# Altium PCB pcb.pcbdoc
Units mil, origin at the board's own origin, x right, y up, seen from the top; angles counter-clockwise.
Board outline 3850 x 2675 mil, 2 copper layers (Top Layer, Bottom Layer); 114 components, 115 nets, 459 pads, 83 vias.
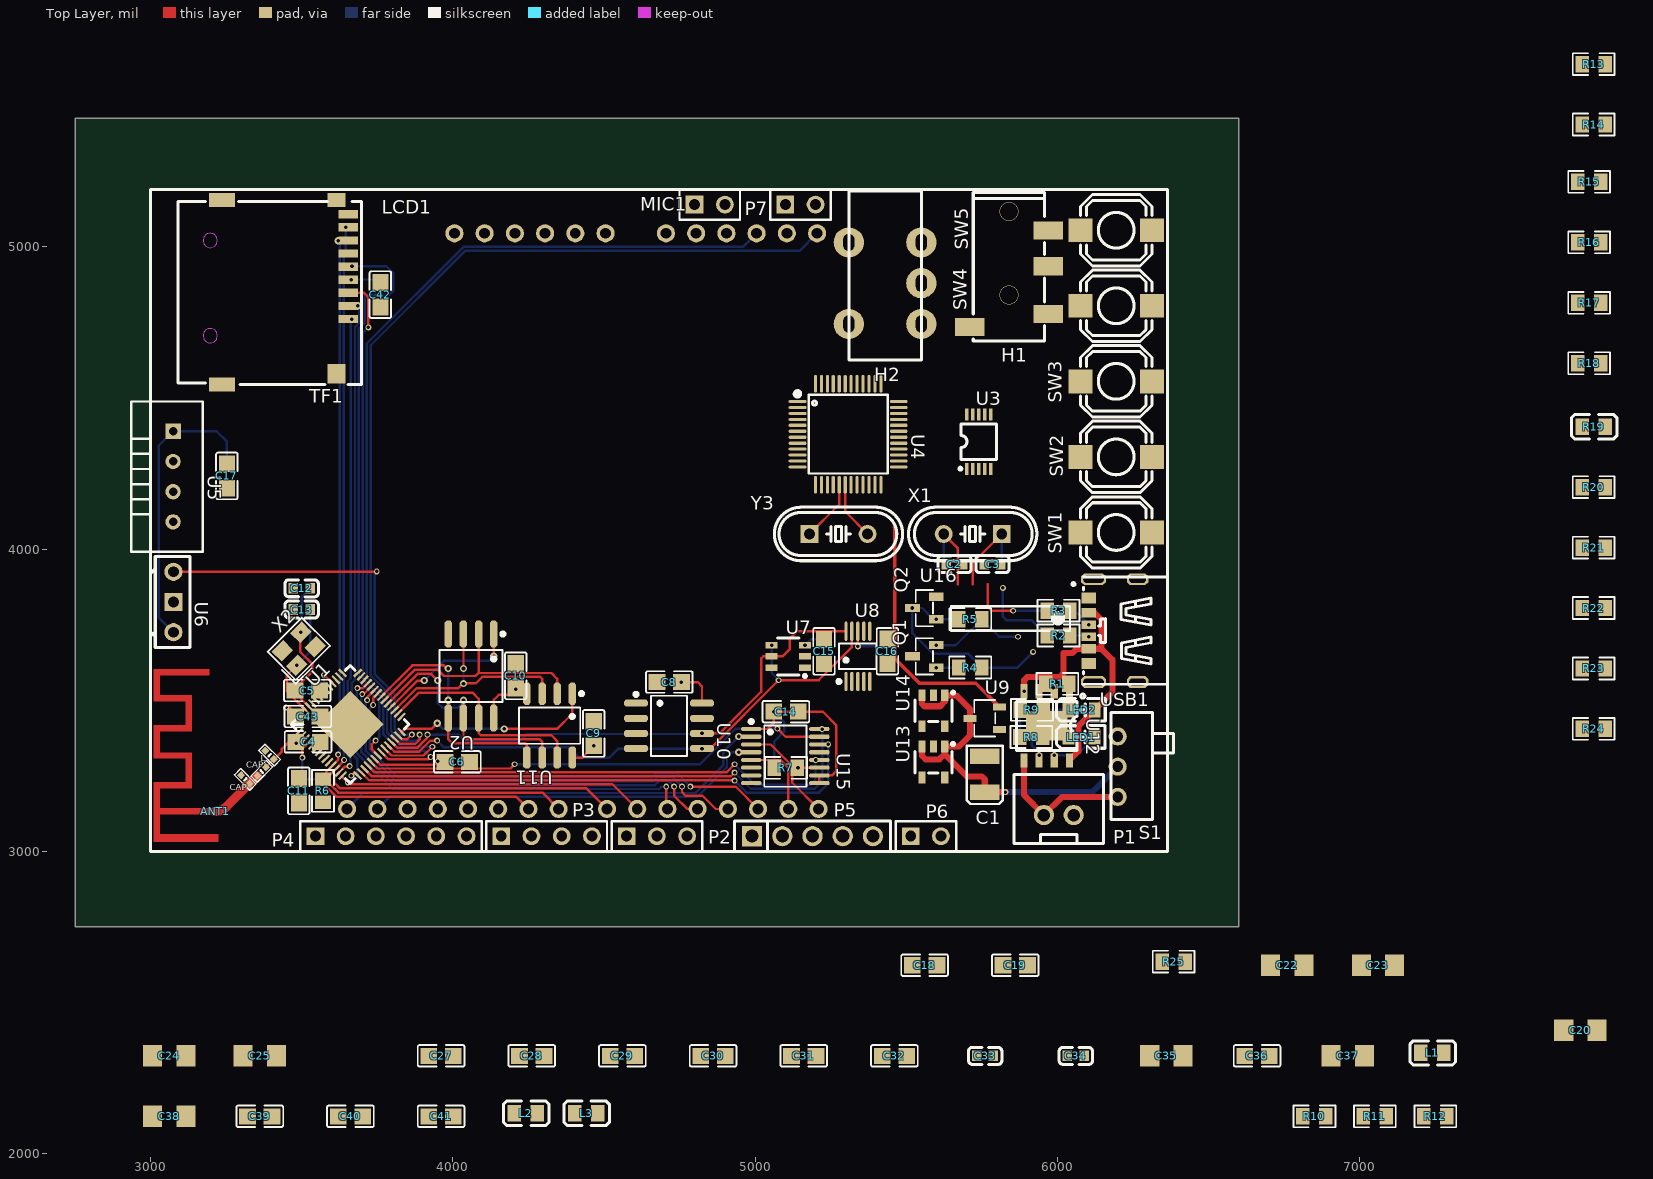
[diagram p0: Top Layer view]
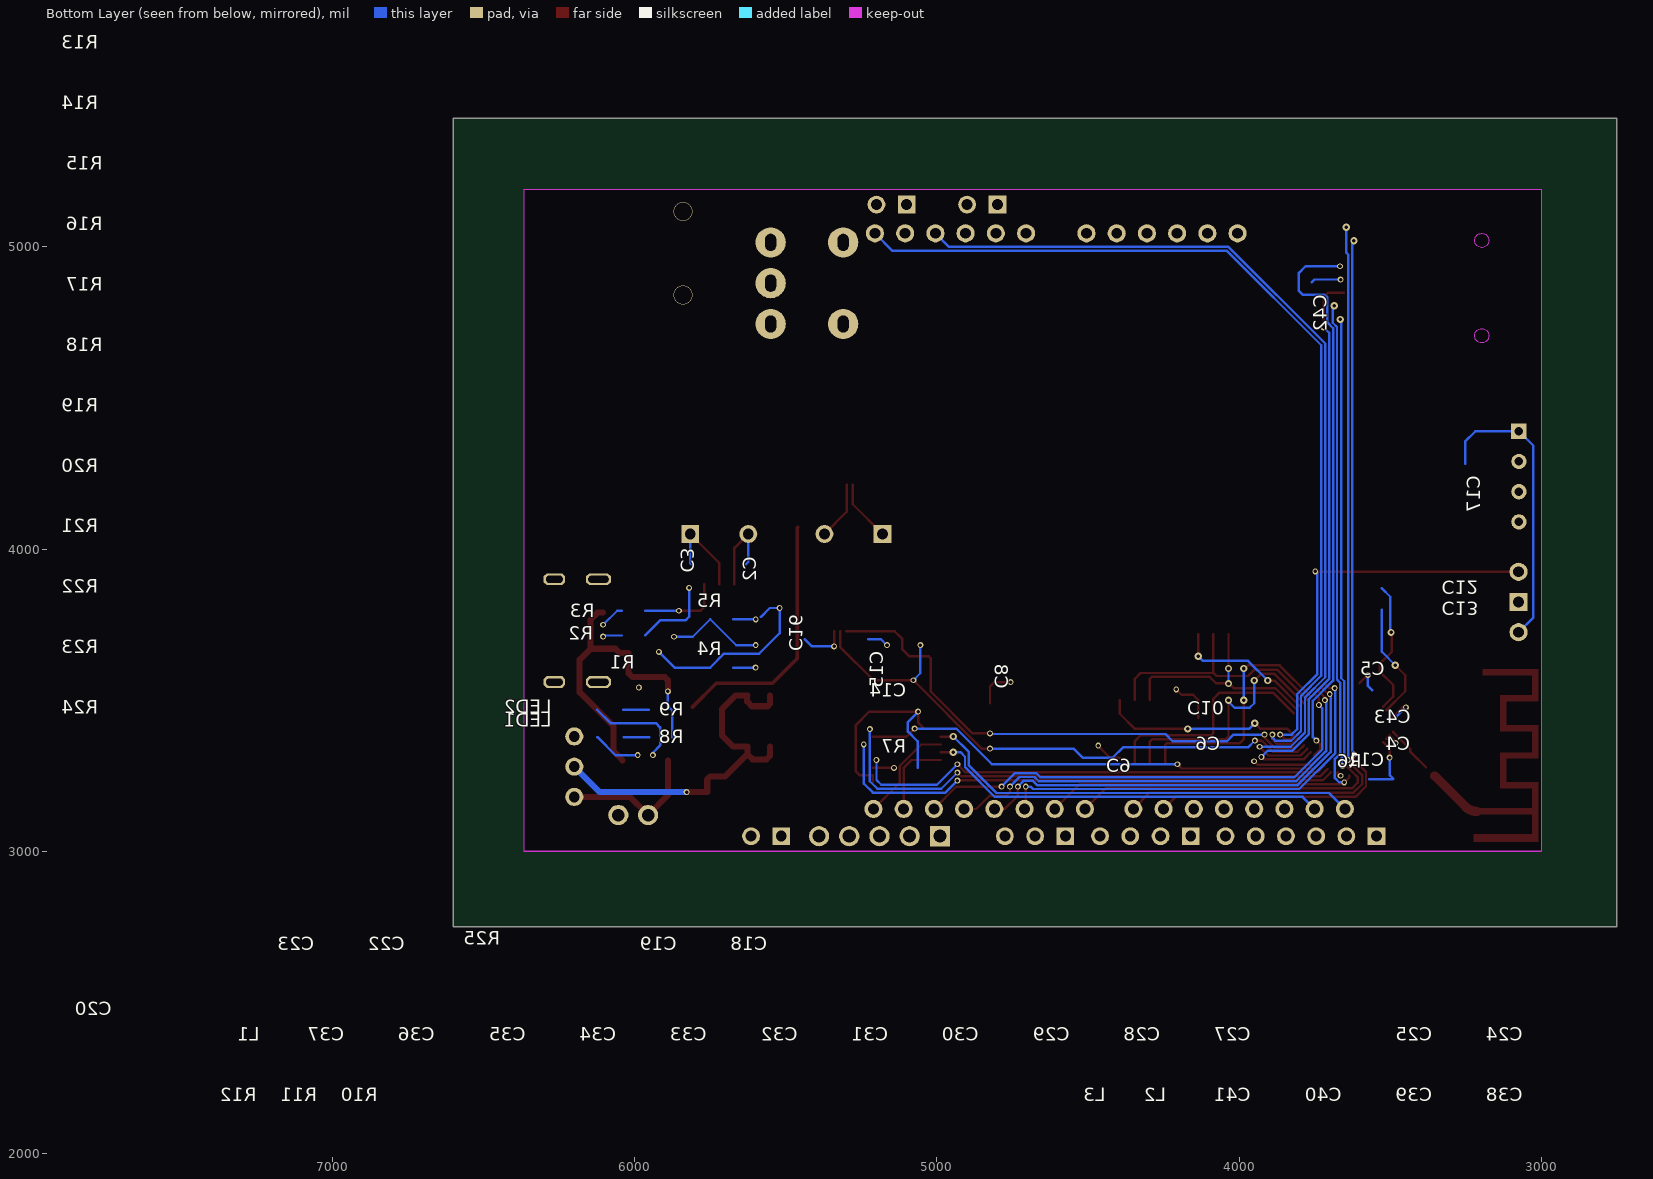
[diagram p1: Bottom Layer view, seen from below]

## Layer stack, top to bottom
Top Solder: solder mask 0.4, Solder Resist, Dk 3.5
Top Layer: signal copper 1.4
Dielectric 1: dielectric 12.6, FR-4, Dk 4.8
Bottom Layer: signal copper 1.4
Bottom Solder: solder mask 0.4, Solder Resist, Dk 3.5

## Board outline
6600,2750 2750,2750 2750,5425 6600,5425
cut-out: 6365,3000 6365,5190 3000,5190 3000,3000 6365,3000
cut-out: 6365,3000 3000,3000 6365,3000

## Design rules (kind name [scope] priority, off if disabled: settings)
Clearance [All] p1: gap=10 ignorepadtopadclearanceinfootprint=FALSE except(0: Arc-Hole Track-Hole SMDPad-Hole THPad-Hole Via-Hole Fill-Hole Poly-Hole Region-Hole Text-Hole)
PolygonConnect [All] p1: connectstyle=Relief reliefconductorwidth=10 reliefentries=4 polygonreliefangle="90 Angle" airgapwidth=10
RoutingVias [All] p1: holewidth=28 width=50 viastyle="Through Hole" minholewidth=28 minwidth=50 maxholewidth=28 maxwidth=50
SolderMaskExpansion [All] p1: expansion=4 istentingtop=FALSE
Width [All] p1: maxlimit=10 minlimit=10 preferedwidth=10
30 further rules are at their usual default settings.

## Components (designator, comment, footprint, x,y, rotation, side; value= is the part's Value field where it differs from the comment)
ANT1 "" MINI_ANT 3214,3132 r0 top
C1 "" 3528B 5760,3255 r90 top
C2 "" C0603 5659.6,3950 r180 bottom
C3 "" C0603 5785.6,3950 r0 bottom
C4 "" C0805_1 3520.6,3362 r180 bottom
C5 "" C0805_1 3518,3532 r180 bottom
C6 "" C0805_1 4014.6,3296 r180 bottom
C8 "" C0805_1 4716,3560 r0 bottom
C9 "" C0805_1 4466,3390 r270 bottom
C10 "" C0805_1 4208,3580.6 r270 bottom
C11 "" C0805_1 3490,3200 r90 bottom
C12 "" C0603_1 3500,3870 r0 bottom
C13 "" C0603_1 3500,3800 r0 bottom
C14 "" C0805_1 5102,3462 r180 bottom
C15 "" C0805_1 5228,3661.5 r270 bottom
C16 "" C0805_1 5438,3662 r90 bottom
C17 "" C0805_1 3252,4242 r270 bottom
C18 "" C0805_1 5561,2623 r180 bottom
C19 "" C0805_1 5861,2623 r180 bottom
C20 "" C3216 7731,2408 r180 bottom
C22 "" C3216 6761,2623 r180 bottom
C23 "" C3216 7061,2623 r180 bottom
C24 "" C3216 3061,2323 r180 bottom
C25 "" C3216 3361,2323 r180 bottom
C27 "" C0805_1 3961,2323 r180 bottom
C28 "" C0805_1 4261,2323 r180 bottom
C29 "" C0805_1 4561,2323 r180 bottom
C30 "" C0805_1 4861,2323 r180 bottom
C31 "" C0805_1 5161,2323 r180 bottom
C32 "" C0805_1 5461,2323 r180 bottom
C33 "" C0603 5761,2323 r180 bottom
C34 "" C0603 6061,2323 r180 bottom
C35 "" C3216 6361,2323 r180 bottom
C36 "" C0805_1 6661,2323 r180 bottom
C37 "" C3216 6961,2323 r180 bottom
C38 "" C3216 3061,2123 r180 bottom
C39 "" C0805_1 3361,2123 r180 bottom
C40 "" C0805_1 3661,2123 r180 bottom
C41 "" C0805_1 3961,2123 r180 bottom
C42 "" C0805_1 3760,4842 r270 bottom
C43 "" C0805 3520,3446 r180 bottom
CAP "" 0402A 3312.9,3237.85 r315 top
CAP "" 0402A 3367.3,3264.05 r225 top
H1 "" PJ320D 5840,5180 r270 top
H2 "" TRS 5310,5185 r270 top
L "" 0402A 3393.5,3318.45 r135 top
L1 "" L0805 7241,2333 r180 bottom
L2 "" L0805 4241.1,2133 r180 bottom
L3 "" L0805 4441.1,2133 r180 bottom
LCD1 "" MAR3501 6365,3000 r180 top locked
LED1 "" LED0805-RD 6080,3378 r0 bottom
LED2 "" LED0805-RD 6080.7,3468 r0 bottom
MIC1 "" HDR1X2 4800,5140 r0 top
P1 "" CONN-TH_2P-P2.50-XH2.54-2P 6005,3120 r180 top
P2 "" HDR1X3 4675,3050 r0 top
P3 "" HDR1X4 4310,3050 r0 top
P4 "" HDR1X6 3795,3050 r0 top
P5 "" HDR-TH_5P-P2.54-V-M 5190,3050 r0 top
P6 "" HDR1X2 5515,3050 r0 top
P7 "" HDR1X2 5100,5140 r0 top
Q1 "" SOT-23-3_L2.9-W1.3-P1.90-LS2.4-BR 5560,3645 r0 top
Q2 "" SOT-23-3_L2.9-W1.3-P1.90-LS2.4-BR 5560,3805 r0 top
R1 "" R0805 6000,3554 r180 bottom
R2 "" R0805 6004,3714 r180 bottom
R3 "" R0805 6004,3796 r180 bottom
R4 "" R0805 5712,3608 r180 bottom
R5 "" R0805 5712,3768 r180 bottom
R6 "" R0805 3570,3200 r90 bottom
R7 "" R0805 5102,3276 r180 bottom
R8 "" R0805 5914,3378 r180 bottom
R9 "" R0805 5916,3468 r180 bottom
R10 "" R0805 6851,2123 r180 bottom
R11 "" R0805 7051,2123 r180 bottom
R12 "" R0805 7251,2123 r180 bottom
R13 "" R0805 7775,5605 r180 bottom
R14 "" R0805 7775,5405 r180 bottom
R15 "" R0805 7760,5215 r180 bottom
R16 "" R0805 7760,5015 r180 bottom
R17 "" R0805 7760,4815 r180 bottom
R18 "" R0805 7760,4615 r180 bottom
R19 "" L0805 7775,4405 r180 bottom
R20 "" R0805 7775,4205 r180 bottom
R21 "" R0805 7775,4005 r180 bottom
R22 "" R0805 7775,3805 r180 bottom
R23 "" R0805 7775,3605 r180 bottom
R24 "" R0805 7775,3405 r180 bottom
R25 "" R0805 6385,2635 r180 bottom
S1 "" MSK-12D19 6315,3460 r270 top
SW1 "" SW-SMD_L6.0-W6.0-P6.00-LS6.6 6195,4055 r180 top
SW2 "" SW-SMD_L6.0-W6.0-P6.00-LS6.6 6195,4305 r180 top
SW3 "" SW-SMD_L6.0-W6.0-P6.00-LS6.6 6195,4555 r180 top
SW4 "" SW-SMD_L6.0-W6.0-P6.00-LS6.6 6195,4805 r180 top
SW5 "" SW-SMD_L6.0-W6.0-P6.00-LS6.6 6195,5055 r180 top
TF1 "" TF-SMD_XKTF-N02-N_1 3445,4850 r270 top
U1 "" ESP32-S3-QFN56 3660,3420 r45 top
U2 "" SOIC-8_L5.3-W5.3-P1.27-LS8.0-BL 4060,3580 r180 top
U3 "" TSSOP-10_L3.0-W3.0-P0.50-LS4.9-BL 5740,4355 r0 top
U4 "" LQFP-48_L7.0-W7.0-P0.50-LS9.0-BL 5308,4380 r270 top
U5 "" SENSOR-TH_DHT11 3066,4240 r270 top
U6 "" HX1838 3075,3925 r270 top
U7 "" SOT-23-6_L2.9-W1.6-P0.95-LS2.8-BR 5110,3645 r0 top
U8 "" MSOP-10_L3.0-W3.0-P0.50-LS5.0-BL 5340,3645 r0 top
U9 "" SOT-23-3_L2.9-W1.6-P1.90-LS2.8-BR 5760,3440 r0 top
U10 "" SOIC-8_L4.9-W3.9-P1.27-LS6.0-BL 4715,3415 r270 top
U11 "" SOP-8_L4.9-W3.9-P1.27-LS6.0-BL 4320,3416 r180 top
U12 "" ESOP-8_L4.9-W3.9-P1.27-LS6.0-BL-EP 5965,3415 r180 top
U13 "" SOT-23-5_L3.0-W1.7-P0.95-LS2.8-BR 5590,3295 r90 top
U14 "" SOT-23-5_L3.0-W1.7-P0.95-LS2.8-BR 5590,3465 r90 top
U15 "" TSSOP-16_L5.0-W4.4-P0.65-LS6.4-BL 5100,3315 r270 top
U16 "" CH340G 5845,3770 r270 top
USB1 "" TYPE-C-SMD_TYPE-C-31-M-16 6185,3730 r90 top
X1 "" HC-49US_L11.5-W4.5-P4.88 5720,4050 r180 top
X2 "" CRYSTAL-SMD_4P-L3.2-W2.5-BL 3490,3670 r45 top
Y3 "" HC-49US_L11.5-W4.5-P4.88 5276,4050 r0 top

## Footprints (in the part's own frame and the unit in brackets; to place one, negate y for a bottom-side part, rotate by r counter-clockwise, add the part's x,y. Pads: shape width x height; smd on the part's side, far side on the other; paste and mask are expansions set on the pad)
0402A [mil]
  rect 20x20 smd mask+4: 1(-20,0) GND(20,0)
  silkscreen extent -36,-15 36,15
3528B [mil]
  rect 51.2x98.4 smd mask+4: 1(-59.1,0) 2(59.1,0)
  silkscreen extent -98,-59 94,59
C0603 [mil]
  rect 31.5x35.4 smd far side mask+2: 1(-27.6,0) 2(27.6,0)
C0603_1 [mil]
  rect 31.5x35.4 smd far side mask+2: 1(-27.6,0) 2(27.6,0)
C0805 [mil]
  rect 55.5x53.2 smd far side mask+2: 1(-40.5,0) 2(40.6,0)
C0805_1 [mil]
  rect 55.5x53.2 smd far side mask+2: 1(-40.5,0) 2(40.6,0)
C3216 [mil]
  rect 63x70.9 smd far side mask+4: 1(-55,0) 2(55,0)
CH340G [mil]
  silkscreen extent -119,-197 40,213
CONN-TH_2P-P2.50-XH2.54-2P [mil]
  round 66.9 hole 41.3 mask+1.97: 1(49.2,0) 2(-49.2,0)
  silkscreen extent -148,-135 148,94
CRYSTAL-SMD_4P-L3.2-W2.5-BL [mil]
  rect 55.1x47.2 smd mask+2: 1(-43.3,-33.5) 2(43.3,-33.5) 3(43.3,33.5) 4(-43.3,33.5)
  silkscreen extent -89,-75 80,66
ESOP-8_L4.9-W3.9-P1.27-LS6.0-BL-EP [mil]
  rect 23.6x47.2 smd mask+2: 1(-75,-114.5) 2(-25,-114.5) 3(25,-114.5) 4(75,-114.5) 5(75,114.5) 6(25,114.5) 7(-25,114.5) 8(-75,114.5)
  rect 137.8x98.4 smd mask+2: 9(0,0)
  silkscreen extent -126,-105 100,81
ESP32-S3-QFN56 [mil]
  rect 35.4x7.9 smd mask+2: 1(-137.8,102.4) 2(-137.8,86.6) 3(-137.8,70.9) 4(-137.8,55.1) 5(-137.8,39.4) 6(-137.8,23.6) 7(-137.8,7.9) 8(-137.8,-7.9) 9(-137.8,-23.6) 10(-137.8,-39.4) 11(-137.8,-55.1) 12(-137.8,-70.9) 13(-137.8,-86.6) 14(-137.8,-102.4) 29(137.8,-102.4) 30(137.8,-86.6) 31(137.8,-70.9) 32(137.8,-55.1) 33(137.8,-39.4) 34(137.8,-23.6) 35(137.8,-7.9) 36(137.8,7.9) 37(137.8,23.6) 38(137.8,39.4) 39(137.8,55.1) 40(137.8,70.9) 41(137.8,102.4) 42(137.8,86.6)
  rect 7.9x35.4 smd mask+2: 15(-102.4,-137.8) 16(-86.6,-137.8) 17(-70.9,-137.8) 18(-55.1,-137.8) 19(-39.4,-137.8) 20(-23.6,-137.8) 21(-7.9,-137.8) 22(7.9,-137.8) 23(23.6,-137.8) 24(39.4,-137.8) 25(55.1,-137.8) 26(70.9,-137.8) 27(86.6,-137.8) 28(102.4,-137.8) 43(102.4,137.8) 44(86.6,137.8) 45(70.9,137.8) 46(55.1,137.8) 47(39.4,137.8) 48(23.6,137.8) 49(7.9,137.8) 50(-7.9,137.8) 51(-23.6,137.8) 52(-39.4,137.8) 53(-55.1,137.8) 54(-70.9,137.8) 55(-86.6,137.8) 56(-102.4,137.8)
  rect 157.5x157.5 smd mask+2: 57(0,0)
  silkscreen extent -138,-138 138,138
HC-49US_L11.5-W4.5-P4.88 [mil]
  rect 59.1x59.1 hole 35.4 mask+2: 1(-96.1,0)
  round 59.1 hole 35.4 mask+2: 2(96.1,0)
  silkscreen extent -212,-89 212,89
HDR1X2 [mil]
  rect 59x59 hole 36 mask+4: 1(0,0)
  round 59 hole 36 mask+4: 2(100,0)
  silkscreen extent -50,-50 150,50
HDR1X3 [mil]
  rect 59x59 hole 36 mask+4: 1(-100,0)
  round 59 hole 36 mask+4: 2(0,0) 3(100,0)
  silkscreen extent -150,-50 150,50
HDR1X4 [mil]
  rect 59x59 hole 36 mask+4: 1(-150,0)
  round 59 hole 36 mask+4: 2(-50,0) 3(50,0) 4(150,0)
  silkscreen extent -200,-50 200,50
HDR1X6 [mil]
  rect 59x59 hole 36 mask+4: 1(-250,0)
  round 59 hole 36 mask+4: 2(-150,0) 3(-50,0) 4(50,0) 5(150,0) 6(250,0)
  silkscreen extent -300,-50 300,50
HDR-TH_5P-P2.54-V-M [mil]
  rect 66.9x66.9 hole 43.3 mask+2: 1(-200,0)
  round 66.9 hole 43.3 mask+2: 2(-100,0) 3(0,0) 4(100,0) 5(200,0)
  silkscreen extent -258,-50 258,50
HX1838 [mil]
  round 60 hole 36 mask+4: 1(0,0) 3(200,0)
  rect 60x60 hole 36 mask+4: 2(100,0)
  silkscreen extent -50,-75 250,55
L0805 [mil]
  rect 44.6x54.2 smd far side mask+2: 1(-38,0) 2(38,0)
LED0805-RD [mil]
  rect 39.4x49.2 smd far side mask+2: 1(-43.3,0) 2(43.3,0)
LQFP-48_L7.0-W7.0-P0.50-LS9.0-BL [mil]
  oct 10.6x59.1 smd mask+1.97: 1(-108.3,-167.3) 2(-88.6,-167.3) 3(-68.9,-167.3) 4(-49.2,-167.3) 5(-29.5,-167.3) 6(-9.8,-167.3) 7(9.8,-167.3) 8(29.5,-167.3) 9(49.2,-167.3) 10(68.9,-167.3) 11(88.6,-167.3) 12(108.3,-167.3) 25(108.3,167.3) 26(88.6,167.3) 27(68.9,167.3) 28(49.2,167.3) 29(29.5,167.3) 30(9.8,167.3) 31(-9.8,167.3) 32(-29.5,167.3) 33(-49.2,167.3) 34(-68.9,167.3) 35(-88.6,167.3) 36(-108.3,167.3)
  oct 59.1x10.6 smd mask+1.97: 13(167.3,-108.3) 14(167.3,-88.6) 15(167.3,-68.9) 16(167.3,-49.2) 17(167.3,-29.5) 18(167.3,-9.8) 19(167.3,9.8) 20(167.3,29.5) 21(167.3,49.2) 22(167.3,68.9) 23(167.3,88.6) 24(167.3,108.3) 37(-167.3,108.3) 38(-167.3,88.6) 39(-167.3,68.9) 40(-167.3,49.2) 41(-167.3,29.5) 42(-167.3,9.8) 43(-167.3,-9.8) 44(-167.3,-29.5) 45(-167.3,-49.2) 46(-167.3,-68.9) 47(-167.3,-88.6) 48(-167.3,-108.3)
  silkscreen extent -141,-176 130,132
MAR3501 [mil]
  round 60 hole 36 mask+4: 1(1155,-140) 2(1255,-140) 3(1355,-140) 4(1455,-140) 5(1555,-140) 6(1655,-140) 7(1755,-140) 8(1855,-140) 9(2015,-140) 10(2115,-140) 11(2215,-140) 12(2315,-140) 13(2415,-140) 14(2515,-140) 15(2615,-140) 16(2715,-140) 17(2360,-2045) 18(2260,-2045) 19(2160,-2045) 20(2060,-2045) 21(1960,-2045) 22(1860,-2045) 23(1660,-2045) 24(1560,-2045) 25(1460,-2045) 26(1360,-2045) 27(1260,-2045) 28(1160,-2045)
  silkscreen extent 0,-2190 3366,0
MINI_ANT [mil]
  Top Layer region: -184,-100.4 -203.7,-100.4 -203.7,96.5 -97.4,96.5 -97.4,175.2 -203.7,175.2 -203.7,285.5 -97.4,285.5 -97.4,364.2 -203.7,364.2 -203.7,470.5 -19.7,470.5 -19.7,450.8 -184,450.8 -184,383.9 -77.7,383.9 -77.7,265.8 -184,265.8 -184,194.9 -77.7,194.9 -77.7,76.8 -184,76.8 -184,9.9 8.9,9.9 8.9,-9.8 -184,-9.8 -184,-100.4
  Top Layer region: -193.9,-100.3 8.9,-100.3 8.9,-75.7 -193.9,-75.7 -193.9,-100.3
MSK-12D19 [mil]
  round 60 hole 36 mask+4: 1(80,-115) 2(180,-115) 3(280,-115)
  silkscreen extent 0,-138 354,70
MSOP-10_L3.0-W3.0-P0.50-LS5.0-BL [mil]
  oct 11x63.8 smd mask+2: 1(-39.4,-83.1) 2(-19.7,-83.1) 3(0,-83.1) 4(19.7,-83.1) 5(39.4,-83.1) 6(39.4,83.1) 7(19.7,83.1) 8(0,83.1) 9(-19.7,83.1) 10(-39.4,83.1)
  silkscreen extent -69,-89 62,42
PJ320D [mil]
  rect 60x98.4 smd mask+4: 2(126,129.9) 3(244.1,129.9) 4(401.6,129.9) 5(444.9,-129.9)
  silkscreen extent 0,-118 492,118
R0805 [mil]
  rect 44.6x54.2 smd far side mask+2: 1(-38,0) 2(38,0)
SENSOR-TH_DHT11 [mil]
  rect 51x51 hole 28 mask+2: 1(-150,7.9)
  round 51 hole 28 mask+2: 2(-50,7.9) 3(50,7.9) 4(150,7.9)
  silkscreen extent -248,-130 248,106
SOIC-8_L4.9-W3.9-P1.27-LS6.0-BL [mil]
  oct 23.2x80.5 smd mask+2: 1(-75,-109.1) 2(-25,-109.1) 3(25,-109.1) 4(75,-109.1) 5(75,109.2) 6(25,109.2) 7(-25,109.2) 8(-75,109.2)
  silkscreen extent -110,-115 100,60
SOIC-8_L5.3-W5.3-P1.27-LS8.0-BL [mil]
  oct 24.8x88.6 smd mask+2: 1(-75,-139) 2(-25,-139) 3(25,-139) 4(75,-139) 5(75,139) 6(25,139) 7(-25,139) 8(-75,139)
  silkscreen extent -111,-145 104,86
SOP-8_L4.9-W3.9-P1.27-LS6.0-BL [mil]
  oct 24.8x73.4 smd mask+2: 1(-75,-105.6) 2(-25,-105.6) 3(25,-105.6) 4(75,-105.6) 5(75,105.6) 6(25,105.6) 7(-25,105.6) 8(-75,105.6)
  silkscreen extent -111,-111 101,60
SOT-23-3_L2.9-W1.3-P1.90-LS2.4-BR [mil]
  rect 49.2x27.6 smd mask+2: 1(39.4,-37.4) 2(39.4,37.4) 3(-39.4,0)
  silkscreen extent -29,-60 29,60
SOT-23-3_L2.9-W1.6-P1.90-LS2.8-BR [mil]
  rect 42.1x23.6 smd mask+2: 1(48.6,-37.4) 2(48.6,37.4) 3(-48.6,0)
  silkscreen extent -34,-60 34,60
SOT-23-5_L3.0-W1.7-P0.95-LS2.8-BR [mil]
  rect 39.4x23.6 smd mask+2: 1(51.2,-37.4) 2(51.2,0) 3(51.2,37.4) 4(-51.2,37.4) 5(-51.2,-37.4)
  silkscreen extent -35,-70 65,61
SOT-23-6_L2.9-W1.6-P0.95-LS2.8-BR [mil]
  rect 39.4x21.7 smd mask+2: 1(55.1,-37.4) 2(55.1,0) 3(55.1,37.4) 4(-55.1,37.4) 5(-55.1,0) 6(-55.1,-37.4)
  silkscreen extent -35,-70 60,61
SW-SMD_L6.0-W6.0-P6.00-LS6.6 [mil]
  rect 78.7x78.7 smd mask+2: 1(-118.1,0) 2(118.1,0)
  silkscreen extent -118,-118 118,118
TF-SMD_XKTF-N02-N_1 [mil]
  rect 27.6x63 smd mask+2: 1(88.6,208.7) 2(45.3,208.7) 3(2,208.7) 4(-41.3,208.7) 5(-84.6,208.7) 6(-128,208.7) 7(-171.3,208.7) 8(-214.6,208.7) 9(-257.9,208.7)
  rect 47.2x59.1 smd mask+2: 10(-305.1,169.3)
  rect 47.2x86.6 smd mask+2: 11(-305.1,-208.7) 13(305.1,-208.7)
  rect 63x59.1 smd mask+2: 12(269.7,169.3)
  Keep-Out Layer board cut-out: -171.3,-224.4 -171.3,-224.4 -181.54,-226.74 -189.75,-233.29 -194.31,-242.75 -194.31,-253.25 -189.75,-262.71 -181.54,-269.26 -171.3,-271.6 -171.3,-271.6 -161.06,-269.26 -152.85,-262.71 -148.29,-253.25 -148.29,-242.75 -152.85,-233.29 -161.06,-226.74 -171.3,-224.4
  Keep-Out Layer board cut-out: 143.7,-224.4 143.7,-224.4 133.46,-226.74 125.25,-233.29 120.69,-242.75 120.69,-253.25 125.25,-262.71 133.46,-269.26 143.7,-271.6 143.7,-271.6 153.94,-269.26 162.15,-262.71 166.71,-253.25 166.71,-242.75 162.15,-233.29 153.94,-226.74 143.7,-224.4
  silkscreen extent -300,-354 305,252
TRS [mil]
  round 100 hole 36 slot 56 at 0 deg mask+10: 1(170,240) 1(170,0) 2(305,240) 3(440,240) 3(440,0)
  silkscreen extent 0,0 560,240
TSSOP-10_L3.0-W3.0-P0.50-LS4.9-BL [mil]
  rect 11.8x39.4 smd mask+2: 1(-39.4,-90.5) 2(-19.7,-90.5) 3(0,-90.5) 4(19.7,-90.5) 5(39.4,-90.5) 6(39.4,90.6) 7(19.7,90.6) 8(0,90.6) 9(-19.7,90.6) 10(-39.4,90.6)
  silkscreen extent -66,-94 59,59
TSSOP-16_L5.0-W4.4-P0.65-LS6.4-BL [mil]
  oct 13.5x68.2 smd mask+2: 1(-89.6,-112.8) 2(-64,-112.8) 3(-38.4,-112.8) 4(-12.8,-112.8) 5(12.8,-112.8) 6(38.4,-112.8) 7(64,-112.8) 8(89.6,-112.8) 9(89.6,112.8) 10(64,112.8) 11(38.4,112.8) 12(12.8,112.8) 13(-12.8,112.8) 14(-38.4,112.8) 15(-64,112.8) 16(-89.6,112.8)
  silkscreen extent -120,-119 101,70
TYPE-C-SMD_TYPE-C-31-M-16 [mil]
  oct 39.4x82.7 hole 23.6 slot 66.9 at 90 deg mask+2: 1(-170.1,65) 2(170.1,65)
  oct 39.4x70.9 hole 23.6 slot 55.1 at 90 deg mask+2: 3(-170.1,-80.7) 4(170.1,-80.7)
  rect 27.6x47.2 smd mask+2: A5(-19.7,80.7) B5(19.7,80.7)
  rect 31.5x47.2 smd mask+2: A9(59.8,80.7) B9(-59.8,80.7)
  rect 35.4x47.2 smd mask+2: A12(108.3,80.7) B12(-108.3,80.7)
  silkscreen extent -177,-179 177,98

## Via types
v1: diameter 19.68, hole 11.81, Top Layer to Bottom Layer, tented both sides, 63 vias
v2: diameter 24, hole 12, Top Layer to Bottom Layer, tented both sides, 18 vias
v3: diameter 62.99, hole 59.06, Top Layer to Bottom Layer, tented both sides, 2 vias

## Nets (pads, with @x,y where several pads share a name; then routed paths per layer and width w, separated by ;. In a path a pad name is that pad's centre, name@x,y a point inside that pad or via, vN(x,y) a via of type N, cw(c..) or ccw(c..) an arc to the next point about the centre after c; other vN are vias at no path point)
$1N91: C2.2 X1.2 | length 288.3
  Top Layer w8: X1.2 5670,4003.9 5670,3884.2
  Bottom Layer w8: X1.2 5623.9,3958.1 5632,3950
$1N92: C3.2 X1.1 | length 306.8
  Top Layer w8: 5720,3884.2 5720,3953.9 X1.1
  Bottom Layer w8: 5813.2,3950 5816.1,3952.9 X1.1
$1N110: Q2.3 R4.1 | length 624.7
  Bottom Layer w8: v1@5520,3804 5520,3722 5588,3654 5704,3654 5750,3608 5868,3608 v1(5920,3660) ; v1(5520.6,3805) 5553,3805 5582.36,3775.64
$1N111: Q1.2 R5.1 | length 329.6
  Bottom Layer w8: v1@5600,3682 5664,3682 5750,3768 5808,3710 v1(5870,3710)
  other v1: 5599.4,3682.4
$1N128: Q2.1 R5.2 | length 74
  Bottom Layer w8: v1@5600,3768 5674,3768
  other v1: 5599.4,3767.6
$1N129: Q1.1 R4.2 | length 74
  Bottom Layer w8: v1(5600,3608) 5674,3608
$1N305: C12.2 U1.53 X2.3 | length 454.2
  Top Layer w8: v2(3496.93,3724.31) 3495,3722.38 3495,3660 3535,3620 3535,3595 3490,3550 3490,3512.08 U1.53
  Bottom Layer w8: v2(3496.93,3724.31) 3500,3727.38 3500,3842.4 3527.6,3870
$1N306: C13.2 U1.54 X2.1 | length 390.7
  Top Layer w8: v2(3483.07,3615.69) 3450,3582.62 3450,3529.73 U1.54
  Bottom Layer w8: v2(3483.07,3615.69) 3527.6,3660.22 3527.6,3800
$2N69: R2.1 USB1.A5 | length 63.7
  Bottom Layer w8: 6042,3714 6100,3714 v1@6104,3710
  other v1: 6104.3,3710.3
$2N70: R3.1 USB1.B5 | length 81.1
  Bottom Layer w8: 6042,3796 6058,3796 v1@6104,3750
  other v1: 6104.3,3749.7
$2N113: P1.1 S1.3 U12.5 | length 476.8
  Top Layer w20: U12.5 5890,3185.8 P1.1 6015.8,3180 S1.3
$2N145: R1.2 U12.2
  other v1: 5986,3542
$2N152: LED1.2 U12.7 | length 158.2
  Bottom Layer w8: v1(5990,3318) 6063.3,3318 6123.3,3378
$2N153: LED2.2 U12.6 | length 334
  Bottom Layer w8: v1(5940,3318) 5940,3326 5916,3350 5916,3410 5930,3424 6080,3424 6124,3468
$2N206: LED2.1 R9.1 | length 83.4
  Bottom Layer w8: 5954,3468 6037.4,3468
$2N207: LED1.1 R8.1 | length 84.7
  Bottom Layer w8: 5952,3378 6036.7,3378
$3N184: P5.1 U8.4
$3N185: P5.2 U8.5
$3N186: P5.3 U8.6
$3N187: P5.4 U8.7
$4N72: R10.1 U4.33
$4N110: C18.2 U3.7
$4N111: C19.2 U3.10
$4N128: C19.1 R11.2 R13.2 R14.2
$4N129: C18.1 R12.2
$4N152: H1.2 R11.1
$4N153: H1.3 R12.1
$4N172: C20.2 C22.2 C23.2 L1.2 U3.9
$4N206: C24.2 U3.5
$4N213: C25.1 U3.6
$4N239: C27.1 P7.1
$4N248: C27.2 R15.1
$4N249: C28.2 R15.2 U4.48
$4N272: C29.2 U4.44
$4N333: C30.2 R16.1
$4N334: C31.2 R17.1
$4N335: C32.2 R18.1
$4N342: H2.3 R16.2 U4.46
$4N343: H2.2 R17.2 U4.39
$4N344: H2.1 R18.2 U4.42
$4N380: C33.2 R19.1 U4.17 Y3.1 | length 203.5
  Top Layer w8: Y3.1 5278.5,4148.6 U4.17
$4N381: C34.2 R19.2 U4.18 Y3.2 | length 193.3
  Top Layer w8: U4.18 5298.2,4123.9 Y3.2
$4N559: C37.2 C38.2 R22.1 R23.2
$4N563: C39.2 C40.1 MIC1.2 R23.1
$4N572: C37.1 R24.1 R25.2
$4N587: C39.1 C41.1 MIC1.1 R24.2
$5N134: R7.1 U15.11 | length 71
  Top Layer w8: v1(5142,3276) 5212.2,3276 U15.11
AVDD: C35.2 L2.2 R20.1 R22.2 U4.38 U4.43 U4.45
CVDD: L3.2 U4.5 U4.7 U4.24 U4.31
DAC_OUT: P6.2 U7.1
DT_OUT: U1.41 U5.2
GND: C1.2 C2.1 C3.1 C4.1 C5.2 C6.1 C8.1 C9.1 C10.1 C11.1 C12.1 C13.1 C14.1 C15.2 C16.1 C17.2 C20.1 C22.1 C23.1 C24.1 C25.2 C33.1 C34.1 C36.1 C42.2 C43.1 CAP.1@3298.76,3251.99 H1.4 H1.5 LCD1.21 P1.2 P2.1 P3.1 P4.2 P5.5 P6.1 R1.1 R10.2 R13.1 R14.1 R21.2 SW1.1 SW2.1 SW3.1 SW4.1 SW5.1 TF1.6 TF1.10 TF1.11 TF1.12 TF1.13 U1.57 U2.4 U3.8 U4.35 U5.4 U6.2 U7.2 U7.6 U8.1 U8.3 U9.1 U10.1 U10.3 U10.4 U10.7 U11.4 U12.1 U12.3 U12.9 U13.2 U14.2 U15.6 USB1.1 USB1.2 USB1.3 USB1.4 USB1.A12 USB1.B12 X2.2 X2.4
GND1: C28.1 C29.1 C30.1 C31.1 C32.1 C35.1 C38.1 P7.2 R21.1 R25.1 U4.4 U4.16 U4.20 U4.21 U4.22 U4.37 U4.40 U4.41 U4.47
GPIO0: Q1.3 SW2.2 U1.5
GPIO3: SW3.2 U1.8
GPIO45: SW4.2 U1.51
GPIO46: SW5.2 U1.52
I2C_SCL: P2.3 U1.25 U7.5 U8.10 U10.6 | length 1771.8
  Top Layer w8: U1.25 3814.92,3343 3883,3343 3916,3376 v1(3916,3386) ; v1(4824.2,3390) 4882,3390 5020,3528 5020,3638 5027,3645 U7.5 5091,3645 5114,3668 5114,3702 5140.1,3728.1 U8.10
  Bottom Layer w8: v1@3924,3386 4018,3386 4040,3364 4220,3364 4244,3388 4822.2,3388 v1(4824.2,3390)
I2C_SDA: P2.2 U1.24 U7.4 U8.9 U10.5 | length 1911.1
  Top Layer w8: U1.24 3805.72,3330 3888.38,3330 3924.38,3366 v1(3948,3366) ; v1(4824.2,3340) 4852,3340 v1(5078,3566) 5210,3566 5320.3,3676.3 U8.9
  Bottom Layer w8: v1(3948,3366) 3970,3344 4384,3344 4418,3310 4518,3310 4548,3340 v1(4824.2,3340) ; v1(5054.9,3682.4) 5054.9,3589.1 v1(5078,3566)
I2S_LRCK: U1.9 U3.3
I2S_MCLK: U1.10 U3.4
I2S_SCLK: U1.7 U3.2
I2S_SDIN: U1.6 U3.1
IOVDD: R20.2 U4.6 U4.14 U4.19 U4.26 U4.32
IR_OUT: U1.27 U6.1 | length 1346.6
  Top Layer w8: U6.1 3747,3925 v1(3748,3926) ; U1.27 3831.81,3370.66 3848.66,3370.66 v1(3864,3386)
  Bottom Layer w8: v1(3748,3926) 3741,3919 3741,3586.54 3808,3519.54 3808,3404 3826,3386 v1(3864,3386)
JATG_CK: P4.5 U1.44
JATG_DI: P4.4 U1.47
JATG_DO: P4.3 U1.45
JATG_MS: P4.6 U1.48
LCD_BL: LCD1.28 U1.26 | length 3168
  Top Layer w8: U1.26 3824.27,3356 3876,3356 3890,3370 v1(3890,3386)
  Bottom Layer w8: v1@3888,3386 v1(3890,3386) ; v1@3890,3384 3890,3376 3880,3366 3827.62,3366 3795,3398.62 3795,3514.15 3728,3581.15 3728,4674.62 4040.38,4987 5147,4987 LCD1.28
LCD_CS: LCD1.26 U1.23 | length 3104.4
  Top Layer w8: U1.23 3796.38,3317 3903,3317 v1(3932,3346)
  Bottom Layer w8: v1(3932,3346) 3829.23,3346 3782,3393.23 3782,3508.77 3715,3575.77 3715,4680 4035,5000 4960,5000 LCD1.26
LCD_RD: LCD1.23 U1.42
LNA: CAP.1@3381.45,3278.19 L.1 U1.1 | length 162.2
  Top Layer w8: CAP.1@3381.45,3278.19 L.1 ; L.1 3408.31,3304.31 3434,3330 3434,3338.82 U1.1
MICN: C41.2 U4.2
MICP: C40.2 U4.1
N16455763:  | length 165.6
  Top Layer w30: 3213.1,3132 3214.08,3132.01 ; 3215.06,3132.04 3216.03,3132.08 ; 3217.01,3132.14 3217.98,3132.22 ; 3218.96,3132.32 3219.93,3132.44 ; 3220.9,3132.57 3221.86,3132.73 ; 3222.83,3132.9 3223.79,3133.08 ; 3224.74,3133.29 3225.7,3133.51 ; 3226.64,3133.75 3227.59,3134.01 ; 3228.53,3134.29 3229.46,3134.58 ; 3230.39,3134.89 3231.31,3135.21 ; 3232.23,3135.56 3233.14,3135.92 ; 3234.04,3136.29 3234.93,3136.69 ; 3235.82,3137.1 3236.7,3137.52 ; 3237.57,3137.96 3238.44,3138.42 ; 3239.3,3138.89 3240.14,3139.38 ; 3240.98,3139.89 3241.81,3140.41 ; 3242.63,3140.94 3243.44,3141.49 ; 3244.23,3142.06 3245.02,3142.64 ; 3245.8,3143.23 3246.57,3143.84 ; 3247.32,3144.46 3248.06,3145.1 ; 3250.1,3146.55 3250.1,3146.75 3353.2,3249.85
RST: C11.2 LCD1.27 Q2.2 R6.2 SW1.2 U1.4 U4.3 | length 215.9
  Top Layer w8: v1(3502,3310) 3502,3339.92 U1.4
  Bottom Layer w8: v1(3502,3310) 3502,3252.6 3490,3240.6 3492.6,3238 3570,3238
RXD: U1.50
S$164: 
SDIO_CLK: TF1.5 U1.21 | length 1878.2
  Top Layer w8: v1(3744,3366) 3732,3354 3732,3336.83 U1.21
  Bottom Layer w8: v1(3666,4936) 3780,4936 3802,4914 3802,4854 3790,4842 3718,4842 3708,4832 3708,4749.62 3689,4730.62 3689,3565 3756,3498 3756,3378 3746,3368 3744,3368 v1(3744,3366)
SDIO_CMD: TF1.3 U1.22 | length 1918.2
  Top Layer w8: TF1.3 3706,4848 3720,4834 v1(3720,4734) ; U1.22 3787.17,3304 3918,3304 v1(3926,3312)
  Bottom Layer w8: v1(3720,4734) 3702,4716 3702,3570.38 3769,3503.38 3769,3387.85 3823.85,3333 3905,3333 v1(3926,3312)
SDIO_D0: LCD1.10 TF1.7 U1.11 | length 2527.7
  Top Layer w8: v1(3620,3320) 3620,3302.08 U1.11 3580,3262.08 3580,3215 3615,3180 4210,3180 LCD1.10
  Bottom Layer w8: v1(3620,3320) 3626.16,3326.16 3626.16,5013.84 v2(3620,5020)
SDIO_D1: LCD1.9 TF1.8 U1.12 | length 2656.2
  Top Layer w8: v1(3640,3302) 3640,3299.73 U1.12 3593,3252.73 3593,3222 3621,3194 4296,3194 LCD1.9
  Bottom Layer w8: v1(3640,3302) 3639.16,3302.84 3639.16,4974.61 3645,4980.45 v2(3645,5065)
SDIO_D2: LCD1.8 TF1.1 U1.13 | length 2509.2
  Top Layer w8: v1(3658,3282) 3656,3280 3642.47,3280 U1.13 3608,3245.53 3608,3226.8 3626.8,3208 4442,3208 LCD1.8
  Bottom Layer w8: v1(3658,3282) 3660,3284 3660,3310 3652.16,3317.84 3652.16,3562.54 3662,3572.38 3662,4757 v2(3665,4760)
SDIO_D3: LCD1.7 TF1.2 U1.14 | length 2642.9
  Top Layer w8: U1.14 3634.97,3245.03 v1(3652,3228) 3655,3228 3661,3222 4528,3222 LCD1.7
  Bottom Layer w8: v1(3652,3228) 3668.65,3228 3682.84,3242.2 3682.84,3305.54 3665.16,3323.23 3665.16,3557.16 3676,3568 3676,4735 3690,4749 3690,4800 v2(3685,4805)
SDIO_D4: LCD1.3 U1.36 | length 1575.3
  Top Layer w8: v1(3736,3484) 3736,3507.17 U1.36 ; v1(4786,3214) 4936,3214 LCD1.3
  Bottom Layer w8: v1(3736,3484) 3725,3473 3725,3336.92 3816.92,3245 4657.58,3245 4671.43,3258.84 4741.16,3258.84 v1(4786,3214)
SDIO_D5: LCD1.4 U1.37 | length 1514.2
  Top Layer w8: v1(3716,3500) 3716,3509.38 U1.37 ; v1(4758,3214) 4758,3196 4770,3184 4826,3184 4870,3140 LCD1.4
  Bottom Layer w8: v1(3716,3500) 3712,3496 3712,3331.54 3811.54,3232 4662.97,3232 4676.81,3245.84 4726.8,3245.84 4758,3214.65 v1(4758,3214)
SDIO_D6: LCD1.5 U1.38 | length 1456.3
  Top Layer w8: v1(3700,3520) 3703.72,3520 v1@3704,3519.72 ; v1@3702.28,3518 v1@3704,3519.72 ; U1.38 v1@3704,3519.72 ; v1(4732,3214) 4732,3184 4776,3140 LCD1.5
  Bottom Layer w8: v1(3700,3520) 3697.16,3517.16 3697.16,3328 3806.15,3219 4668.35,3219 4682.2,3232.84 4713.8,3232.84 4732.32,3214.32 v1(4732,3214)
SDIO_D7: LCD1.6 U1.39 | length 1410.2
  Top Layer w8: v1(3684,3540) 3702.08,3540 U1.39 ; v1(4706,3214) 4706,3144 LCD1.6
  Bottom Layer w8: v1(3684,3540) 3684,3538 3681.16,3535.16 3681.16,3325.61 3800.77,3206 4682,3206 4690,3214 v1(4706,3214)
SPI_CLK: LCD1.24 P3.4 U1.17 U4.28 U15.16 | length 1734.1
  Top Layer w8: U1.17 3731.73,3248 4919.39,3248 4931.39,3260 v1(4932,3260)
  Bottom Layer w8: v1(4932,3260) 4932.65,3260 4985.65,3207 5197,3207 5222,3232 v1(5222,3404)
SPI_MISO: P3.2 U1.18 U4.30 U15.12 | length 1602.9
  Top Layer w8: U1.18 3741.08,3261 4905,3261 v1(4932,3288)
  Bottom Layer w8: v1(4932,3288) 5000,3220 5184,3220 5200,3236 v1(5200,3302)
SPI_MOSI: LCD1.25 P3.3 U1.16 U4.29 U15.14 | length 1716.1
  Top Layer w8: U1.16 3722.53,3235 4931,3235 v1(4932,3234)
  Bottom Layer w8: v1(4932,3234) 4972,3194 5212,3194 5242,3224 v1(5242,3354)
SPICLK: U1.33 U2.6 U11.6 | length 854.3
  Top Layer w8: U1.33 3882.7,3587 3928.09,3587 v2(3950,3565) ; v2(4035,3500) U2.6 4035,3380 4044,3371 4287,3371 4295,3363 U11.6@4295,3289.4
  Bottom Layer w8: v2(3950,3565) 3950,3490 3965,3475 4015,3475 4035,3495 v2(4035,3500)
SPICS0: U1.32 U2.1 | length 481.5
  Top Layer w8: U1.32 3883,3565 v2(3905,3565) ; v2(4135,3645) U2.1
  Bottom Layer w8: v2(3905,3565) 3970,3630 4120,3630 v2(4135,3645)
SPICS1: U1.28 U11.1 | length 651.4
  Top Layer w8: U1.28 3839.88,3405 3929,3405 v2(3948,3424) ; v2(4170,3405) 4345,3405 4395,3455 U11.1@4395,3500.6
  Bottom Layer w8: v2(3948,3424) 3967,3405 v2(4170,3405)
SPID0: U1.35 U2.5 U11.5 | length 833.3
  Top Layer w8: U1.35 3866.1,3615 3970,3615 3980,3605 v2(3985,3605) ; v2(3985,3500) U2.5 3985,3370 3997,3358 4238,3358 4245,3351 U11.5@4245,3289.4
  Bottom Layer w8: v2(3985,3500) v2(3985,3605)
SPID1: U1.34 U2.2 U11.2 | length 832.6
  Top Layer w8: U1.34@3774.1,3500.7 3874.4,3601 3949,3601 3970,3580 4075,3580 4085,3590 ; U2.2 4085,3590 ; U11.2@4345,3500.6 4345,3571 4326,3590 4085,3590
SPID2: U1.31 U2.3 U11.3 | length 769.8
  Top Layer w8: U1.31@3807.5,3467.3 3880.2,3540 4018,3540 4034,3556 4076,3556 4097,3577 4289,3577 4295,3571 U11.3@4295,3500.6 ; v2(4035,3605) U2.3
  Bottom Layer w8: v2(4035,3555) v2(4035,3605)
SPID3: U1.30 U2.7 U11.7 | length 763.5
  Top Layer w8: U1.30 3887.5,3525 4065,3525 4085,3505 U2.7 4085,3391 4092,3384 4326,3384 4345,3365 U11.7@4345,3289.4
TOUCH: U1.15 | length 35.4
  Top Layer w8: v1@3660,3248 3673.59,3261.59 U1.15
  other v1: 3664,3250
TXD: U1.49
USB+: R2.2 | length 267.7
  Bottom Layer w8: v1(5820,3872) 5820,3776 5832,3764 5916,3764 5966,3714
USB-: R3.2 | length 277.2
  Top Layer w8: 5770,3884.2 5770,3808 5782,3796 v1(5854,3796)
  Bottom Layer w8: v1(5854,3796) 5966,3796
VCC1.8: C36.2 L3.1 U9.2 | length 848
  Top Layer w12: 5460,4072 5462,4070 5462,3638 5544,3556 5730,3556 U9.2
VCC3.3: C4.2 C5.1 C6.2 C8.2 C9.2 C10.2 C14.2 C15.1 C16.2 C17.1 C42.1 C43.2 L1.1 L2.1 P4.1 R6.1 R7.2 TF1.4 U1.2 U1.3 U1.20 U1.46 U1.55 U1.56 U2.8 U5.1 U6.3 U7.3 U8.8 U10.2 U10.8 U11.8 U13.5 U15.1 U15.9 U15.10 | length 2946
  Top Layer w8: v1(3448,3476) 3459.18,3476 U1.56 U1.55 ; v1(3482,3358) 3480,3360 3480,3362.47 U1.2 U1.3 ; v1(3574,3584) 3601.52,3556.48 U1.46 ; U1.20 3759.62,3287 3939,3287 v1(3950,3298) ; U2.8 4135,3501 4152,3518 4190,3518 v1(4208,3536) ; U11.8 4395.4,3310 4428,3310 C9.2@4466,3348 ; v1(4756,3560) 4810,3560 4824.2,3545.8 U10.8 ; U15.1 5040.6,3404.6 5062,3426 v1(5062,3462) 5224,3462 5268,3418 5268,3264 5255,3251 U15.10 U15.9 ; v1(5340,3678) U8.8
  Bottom Layer w8: U6.3 3026,3774 3026,4342 3074,4390 3218,4390 3252,4356 3252,4282.5 ; v1(3448,3476) 3449.4,3476 3479.4,3446 ; 3558.5,3532 3574,3547.5 v1(3574,3584) ; v1(3664,4892) 3750.5,4892 3760,4882.5 ; v1@5061.4,3462 5096,3427.4 5096,3396 5064,3364 5064,3276 ; v1@5166,3682 5186,3702 5228,3702 ; v1(5340,3678) 5413.4,3678 5438,3702.6
  other v1: 4466,3349.4 5165.1,3682.4
VCC5: R8.2 R9.2 U12.4 U12.8 USB1.A9 USB1.B9 | length 1124
  Top Layer w20: v1(5890,3529.5) 5890,3566 5900,3576 6007.3,3576 6020,3588.7 6020,3655.8 6049.8,3655.8 6064.2,3670.2 USB1.B9 6145.8,3670.2 ; U12.8 6070,3330.5 6070,3414 6182,3526 6182,3634 6145.8,3670.2 ; USB1.A9 6122.81,3789.8 6146.2,3766.41 6146.2,3670.6 6145.8,3670.2
  Bottom Layer w8: 5876,3378 5876,3466 5890,3480 v1@5890,3530
VCCBAT: C1.1 S1.2 U9.3 U13.1 U13.3 U14.1 U14.3 | length 1250.2
  Top Layer w20: U13.3 5552.6,3315.4 5564,3304 5610,3304 5627.4,3321.4 ; U14.3 5552.6,3487.4 5560,3480 5612,3480 5628,3496 5628,3515.6 U14.1 5665.8,3516.2 5711.4,3470.6 U9.3 5711.4,3383.4 5674.2,3346.2 U13.1 5627.4,3321.4 ; v1(5828,3196) 5760.1,3196 C1.1 5760,3238 5750,3248 5700.8,3248 5627.4,3321.4
  Bottom Layer w20: v1(5828,3196) 6116,3196 S1.2
VCCLCD: LCD1.18 U14.5
VS_CS: U1.43 U4.23
X1: LCD1.15 U15.4 | length 1335.3
  Top Layer w8: v2(4946,3328) 4947.6,3328 4947.8,3327.8 U15.4
  Bottom Layer w8: LCD1.15 3790,3180 4808.38,3180 4907,3278.62 4907,3313 4922,3328 v2(4946,3328)
X2: LCD1.16 U15.2 | length 1462.8
  Top Layer w8: v2(4946,3380) 4947,3379 U15.2
  Bottom Layer w8: LCD1.16 3703,3193 4803,3193 4894,3284 4894,3328 v2(4946,3380)
XY_BUSY: U1.40 U8.2 U15.13
XY_CS: U1.19 U15.15 | length 1557.7
  Top Layer w8: U1.19 3750.28,3274 4190,3274 v1(4204,3288) ; v1(5074,3406) 5101,3379 U15.15
  Bottom Layer w8: v1(4204,3288) 4818,3288 4936,3406 v1(5074,3406)
Y1: LCD1.1 U15.3 | length 343.4
  Top Layer w8: U15.3 5051.6,3353.4 5123,3282 5123,3227 LCD1.1
Y2: LCD1.2 U15.5 | length 269.7
  Top Layer w8: U15.5 5083.8,3302.2 5110,3276 LCD1.2
pads on no net: CAP.GND L.GND LCD1.11 LCD1.12 LCD1.13 LCD1.14 LCD1.17 LCD1.19 LCD1.20 LCD1.22 S1.1 TF1.9 U1.29 U4.8 U4.9 U4.10 U4.11 U4.12 U4.13 U4.15 U4.25 U4.27 U4.34 U4.36 U5.3 U13.4 U14.4 U15.7 U15.8
copper on no net:
  other v3: 5840,4841.4 5840,5117